# Altium PCB JacdacRgbLedBar10 58.PcbDoc
Units mm, origin at the board's own origin, x right, y up, seen from the top; angles counter-clockwise.
Board outline 16.5 x 83.15 mm, 2 copper layers (Top Layer, Bottom Layer), stack 1.525 mm thick; 47 components, 24 nets, 144 pads, 28 vias.
Unrouted connection lines stored in the file: 14.
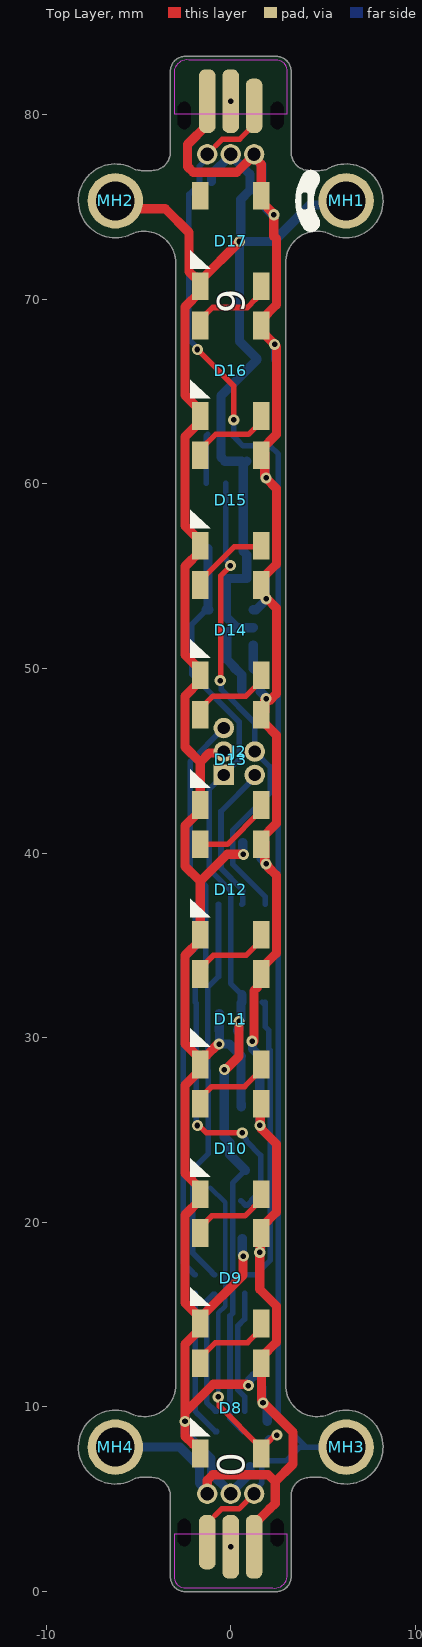
[diagram p0: Top Layer view]
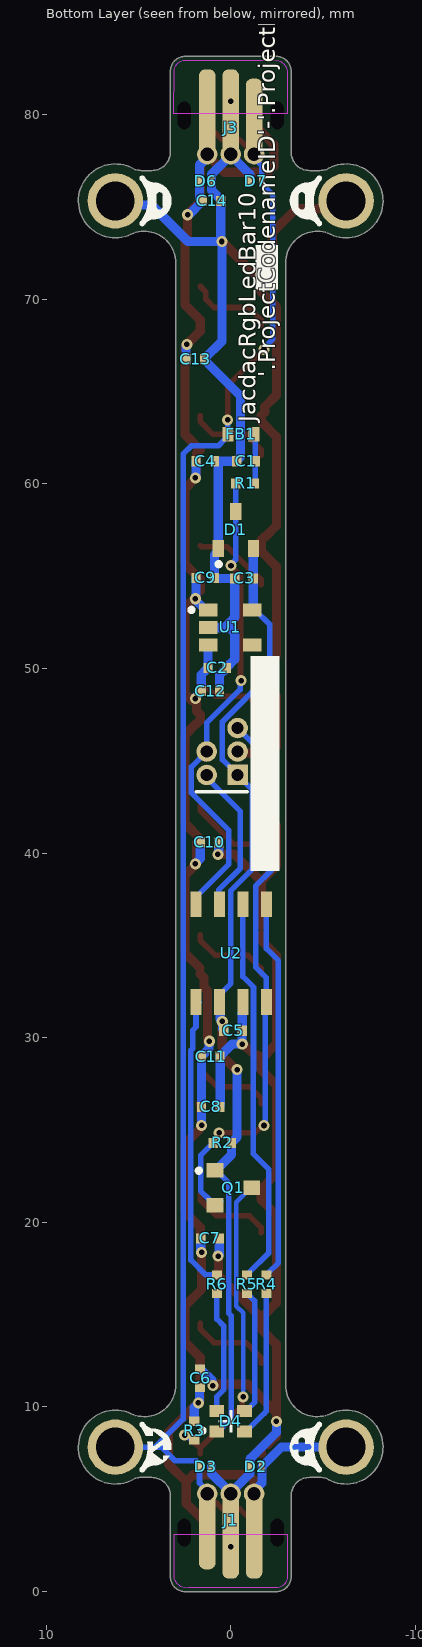
[diagram p1: Bottom Layer view, seen from below]
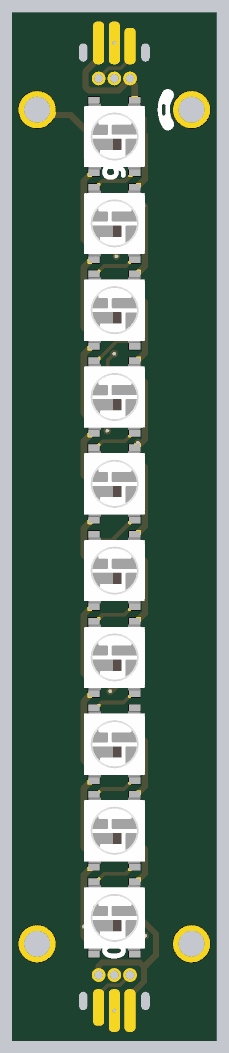
[diagram p2: 3D render of the assembled board from above, using the file's embedded part models]

## Layer stack, top to bottom
Top Solder: solder mask 0.0102, Solder Resist, Dk 3.5
Top Layer: signal copper 0.0356
Dielectric 1: core 1.454, FR-4, Dk 4.2
Bottom Layer: signal copper 0.0356
Bottom Solder: solder mask 0.0102, Solder Resist, Dk 3.5

## Board outline
-4.831,6.183 -4.27,6.183 cw(c-4.27,5.183) -3.27,5.183 -3.27,0.8 ccw(c-2.47,0.8) -2.47,0 2.47,0 ccw(c2.47,0.8) 3.27,0.8 3.27,5.183 cw(c4.27,5.183) 4.27,6.183 4.831,6.183 cw(c4.831,5.183) 5.304,6.064 ccw(c6.25,7.826) 5.4,9.636 cw(c4.677,11.175) 2.977,11.175 2.977,71.976 cw(c4.677,71.976) 5.4,73.515 ccw(c6.25,75.325) 5.304,77.087 cw(c4.831,77.968) 4.831,76.968 4.27,76.968 cw(c4.27,77.968) 3.27,77.968 3.27,77.966 3.27,82.35 ccw(c2.47,82.35) 2.47,83.15 -2.47,83.15 ccw(c-2.47,82.35) -3.27,82.35 -3.27,77.965 -3.27,77.968 cw(c-4.27,77.968) -4.27,76.968 -4.831,76.968 cw(c-4.831,77.968) -5.304,77.087 ccw(c-6.25,75.325) -5.4,73.515 cw(c-4.677,71.976) -2.977,71.976 -2.978,11.175 cw(c-4.678,11.175) -5.4,9.636 ccw(c-6.25,7.826) -5.304,6.064 cw(c-4.831,5.183)

## Design rules (kind name [scope] priority, off if disabled: settings)
AssemblyTestPointUsage [All] p1: valid=2
BoardOutlineClearance BoardOutlineSwitchClearance [InComponent('SW1')] p1: gap=0.3 ignorepadtopadclearanceinfootprint=FALSE except(0: Arc-SplitContinuation Track-SplitContinuation SMDPad-SplitContinuation THPad-OutlineEdge THPad-SplitContinuation Via-SplitContinuation Fill-SplitContinuation Poly-SplitContinuation Region-SplitContinuation Text-SplitContinuation; 0.2: Text-OutlineEdge)
BoardOutlineClearance [All] p2: gap=0.3 ignorepadtopadclearanceinfootprint=FALSE except(0: Arc-SplitContinuation Track-CutoutEdge Track-SplitContinuation SMDPad-SplitContinuation THPad-SplitContinuation Via-SplitContinuation Fill-SplitContinuation Poly-SplitContinuation Region-OutlineEdge Region-SplitContinuation Text-OutlineEdge Text-SplitContinuation; 0.2: SMDPad-CutoutEdge; 0.25: Arc-OutlineEdge Arc-CutoutEdge Track-OutlineEdge SMDPad-OutlineEdge THPad-OutlineEdge Poly-OutlineEdge Region-CutoutEdge)
Clearance [All] p1: gap=0.125 ignorepadtopadclearanceinfootprint=FALSE except(0: Arc-Hole Track-Hole SMDPad-Hole THPad-Hole Via-Hole Fill-Hole Poly-Hole Region-Hole Text-Hole)
ComponentClearance MH5.0KeepoutaAreaClearance [InComponent('MH1') or InComponent('MH2')  or InComponent('MH3') or InComponent('MH4') or InComponent('J2') vs InComponent('D6') or InComponent('D7') or InComponent('D8') or InComponent('D9') or InComponent('D10') or InComponent('D11') or InComponent('D12') or InComponent('D13') or InComponent('C6') or InComponent('C7') or InComponent('C8')  or  InComponent('C9') or  InComponent('C12')] p1: gap=0 collisioncheckmode=3 verticalgap=0 showdistances=FALSE
ComponentClearance [All] p2: gap=0.2 collisioncheckmode=3 verticalgap=0.2 showdistances=FALSE
DiffPairsRouting [All] p1: maxlimit=2 minlimit=0.15 mostfreqgap=0.15 toplayer_minwidth=0.15 toplayer_maxwidth=2 toplayer_prefwidth=0.15 bottomlayer_minwidth=0.15 bottomlayer_maxwidth=2 bottomlayer_prefwidth=0.15 substack1={CB9D278B-8BF5-444A-AAF4-837A2A9DF42D} toplayer_{cb9d278b-8bf5-444a-aaf4-837a2a9df42d}_minwidth=0.381 toplayer_{cb9d278b-8bf5-444a-aaf4-837a2a9df42d}_maxwidth=0.381 toplayer_{cb9d278b-8bf5-444a-aaf4-837a2a9df42d}_prefwidth=0.381 bottomlayer_{cb9d278b-8bf5-444a-aaf4-837a2a9df42d}_minwidth=0.381 bottomlayer_{cb9d278b-8bf5-444a-aaf4-837a2a9df42d}_maxwidth=0.381 bottomlayer_{cb9d278b-8bf5-444a-aaf4-837a2a9df42d}_prefwidth=0.381 substack2={826B8647-A721-4255-895A-19F9591B9CD1} toplayer_{826b8647-a721-4255-895a-19f9591b9cd1}_minwidth=0.381 toplayer_{826b8647-a721-4255-895a-19f9591b9cd1}_maxwidth=0.381 toplayer_{826b8647-a721-4255-895a-19f9591b9cd1}_prefwidth=0.381 bottomlayer_{826b8647-a721-4255-895a-19f9591b9cd1}_minwidth=0.381 bottomlayer_{826b8647-a721-4255-895a-19f9591b9cd1}_maxwidth=0.381 bottomlayer_{826b8647-a721-4255-895a-19f9591b9cd1}_prefwidth=0.381 substack3={E64FCAF4-1BC8-437D-B1E0-0E5F2DC0F59E} toplayer_{e64fcaf4-1bc8-437d-b1e0-0e5f2dc0f59e}_minwidth=0.381 toplayer_{e64fcaf4-1bc8-437d-b1e0-0e5f2dc0f59e}_maxwidth=0.381 toplayer_{e64fcaf4-1bc8-437d-b1e0-0e5f2dc0f59e}_prefwidth=0.381 bottomlayer_{e64fcaf4-1bc8-437d-b1e0-0e5f2dc0f59e}_minwidth=0.381 bottomlayer_{e64fcaf4-1bc8-437d-b1e0-0e5f2dc0f59e}_maxwidth=0.381 bottomlayer_{e64fcaf4-1bc8-437d-b1e0-0e5f2dc0f59e}_prefwidth=0.381 substack4={E61CE66C-507C-4E1E-8E83-C905434AFC1C} toplayer_{e61ce66c-507c-4e1e-8e83-c905434afc1c}_minwidth=0.381 toplayer_{e61ce66c-507c-4e1e-8e83-c905434afc1c}_maxwidth=0.381 toplayer_{e61ce66c-507c-4e1e-8e83-c905434afc1c}_prefwidth=0.381 bottomlayer_{e61ce66c-507c-4e1e-8e83-c905434afc1c}_minwidth=0.381 bottomlayer_{e61ce66c-507c-4e1e-8e83-c905434afc1c}_maxwidth=0.381 bottomlayer_{e61ce66c-507c-4e1e-8e83-c905434afc1c}_prefwidth=0.381 maxuncoupledlength=25
FabricationTestPointUsage [All] p1: valid=2 allowmultiple=FALSE
HoleSize [All] p1: absolutevalues=TRUE maxlimit=2.54 minlimit=0.2 maxpercent=80.000 minpercent=20.000
MinimumSolderMaskSliver [All] p1: minsoldermaskwidth=0.005
PlaneClearance [All] p1: clearance=0.3
PlaneConnect [All] p1: planeconnectstyle=Relief reliefexpansion=0.5 reliefentries=4 reliefconductorwidth=0.2 reliefairgap=0.3
PolygonConnect "PolygonConnect GND" [isVIA] p1: connectstyle=Relief reliefconductorwidth=0.2 reliefentries=4 polygonreliefangle="90 Angle" airgapwidth=0.2
PolygonConnect [All] p2: connectstyle=Relief reliefconductorwidth=0.2 reliefentries=4 polygonreliefangle="90 Angle" airgapwidth=0.2
RoutingVias [All] p1: holewidth=0.3 width=0.6 viastyle="Through Hole" minholewidth=0.3 minwidth=0.6 maxholewidth=0.3 maxwidth=0.8
SilkToSilkClearance [All] p1: silktosilkclearance=0.001
SilkToSolderMaskClearance [IsPad] p1: minsilkscreentomaskgap=0.05 clearancetoexposedcopper=TRUE
SolderMaskExpansion [All] p1: expansion=0.075 istentingtop=FALSE
Width [All] p1: maxlimit=2 minlimit=0.15 preferedwidth=0.15 substack1={CB9D278B-8BF5-444A-AAF4-837A2A9DF42D} substack2={826B8647-A721-4255-895A-19F9591B9CD1} substack3={E64FCAF4-1BC8-437D-B1E0-0E5F2DC0F59E} substack4={E61CE66C-507C-4E1E-8E83-C905434AFC1C} minimp=50.000000 maximp=50.000000 favimp=50.000000
20 further rules are at their usual default settings.

## Components (designator, comment, footprint, x,y, rotation, side; value= is the part's Value field where it differs from the comment)
C1 "CL05C330JB51PNC" "C0402_0.55MM - WITHOUT OUTLINE" -0.825,61.225 r180 bottom
C2 "CL05A105KP5NNNC" "C0402_0.55MM - WITHOUT OUTLINE" 0.725,50.025 r0 bottom
C3 "CL05A105KP5NNNC" "C0402_0.55MM - WITHOUT OUTLINE" -0.725,54.875 r180 bottom
C4 "CL05B104KP5NNNC" "C0402_0.55MM - WITHOUT OUTLINE" 1.375,61.225 r0 bottom
C5 "CL05A105KP5NNNC" "C0402_0.55MM - WITHOUT OUTLINE" -0.125,30.375 r0 bottom
C6 "CL05B104KP5NNNC" "C0402_0.55MM - WITHOUT OUTLINE" 1.662,11.55 r270 bottom
C7 "CL05B104KP5NNNC" "C0402_0.55MM - WITHOUT OUTLINE" 1.125,19.125 r0 bottom
C8 "CL05B104KP5NNNC" "C0402_0.55MM - WITHOUT OUTLINE" 1.075,26.25 r0 bottom
C9 "CL05B104KP5NNNC" "C0402_0.55MM - WITHOUT OUTLINE" 1.375,54.9 r0 bottom
C10 "CL05B104KP5NNNC" "C0402_0.55MM - WITHOUT OUTLINE" 1.15,40.575 r0 bottom
C11 "CL05B104KP5NNNC" "C0402_0.55MM - WITHOUT OUTLINE" 1.075,28.975 r0 bottom
C12 "CL05B104KP5NNNC" "C0402_0.55MM - WITHOUT OUTLINE" 1.1,48.775 r0 bottom
C13 "CL05B104KP5NNNC" "C0402_0.55MM - without outline" 1.925,66.75 r0 bottom
C14 "CL05B104KP5NNNC" "C0402_0.55MM - without outline" 1.04,75.325 r0 bottom
D1 "BAT54S" "NXP-BAT54S-TO-236AB - WITHOUT OUTLINE" -0.275,57.5 r90 bottom
D2 "RCLAMP0521P-N" "TVS 0402 - without outline" -1.365,6.77 r0 bottom
D3 "RCLAMP0521P-N" "TVS 0402 - without outline" 1.365,6.77 r180 bottom
D4 "TZ-P4-1615RGBTCA1-0.55T" TZ-P4-1615RGBTCA1-0.55T 0,9.222 r180 bottom
D6 "RCLAMP0521P-N" "TVS 0402 - without outline" 1.365,76.38 r180 bottom
D7 "RCLAMP0521P-N" "TVS 0402 - without outline" -1.365,76.38 r0 bottom
D8 "WS2812E" WS2812E-5050 0,9.925 r270 top
D9 "WS2812E" WS2812E-5050 0,16.975 r270 top
D10 "WS2812E" WS2812E-5050 0,23.975 r270 top
D11 "WS2812E" WS2812E-5050 0,31 r270 top
D12 "WS2812E" WS2812E-5050 0,38.025 r270 top
D13 "WS2812E" WS2812E-5050 0,45.05 r270 top
D14 "WS2812E" WS2812E-5050 0,52.075 r270 top
D15 "WS2812E" WS2812E-5050 0,59.1 r270 top
D16 "WS2812E" WS2812E-5050 0,66.125 r270 top
D17 "WS2812E" WS2812E-5050 0,73.15 r270 top
FB1 "TDK MPZ1608S102ATA00" "TDK MPZ1608 0.8mm - without outline" -0.55,62.68 r180 bottom
J1 "3 pin JACDAC edge connector" JACDAC_EDGE_CONNECTOR_NO_TRACES 0,5.85 r0 bottom
J2 "Hack Connect Mini 1.27 mm pitch 2-row" HACK_CONNECT_MINI_5_X_1_27 -0.375,44.23 r0 top
J3 "3 pin JACDAC edge connector" JACDAC_EDGE_CONNECTOR_NO_TRACES 0,77.3 r180 bottom
MH1 "MH_5.0MMK_3.0MMC_2.1MMD_PTH" MH_5.0MMK_3.0MMC_2.1MMD_PTH 6.25,75.325 r0 top
MH2 "MH_5.0MMK_3.0MMC_2.1MMD_PTH" MH_5.0MMK_3.0MMC_2.1MMD_PTH -6.25,75.325 r225 top
MH3 "MH_5.0MMK_3.0MMC_2.1MMD_PTH" MH_5.0MMK_3.0MMC_2.1MMD_PTH 6.25,7.825 r0 top
MH4 "MH_5.0MMK_3.0MMC_2.1MMD_PTH" MH_5.0MMK_3.0MMC_2.1MMD_PTH -6.25,7.825 r180 top
Q1 "2N7002K" SOT-23 -0.15,21.875 r180 bottom
R1 "RC0402FR-07220RL" "R0402 - Without outline" -0.775,60.025 r180 bottom
R2 "10k" "R0402 - Without outline" 0.45,24.3 r0 bottom
R3 "10k" "R0402 - Without outline" 1.975,8.725 r270 bottom
R4 "RC0402FR-0730RL" "R0402 - WITHOUT OUTLINE" -1.93,16.65 r90 bottom
R5 "RC0402FR-0730RL" "R0402 - Without outline" -0.875,16.65 r90 bottom
R6 "RC0402FR-07150RL" "R0402 - Without outline" 0.75,16.65 r90 bottom
U1 "LDO 3.3V/300 mA" "ON_SEMI-SOT23-5 - WITHOUT OUTLINE" 0.025,52.225 r180 bottom
U2 "STM32G031J6M6" 8-SOIC -0.025,34.575 r90 bottom

## Footprints (in the part's own frame and the unit in brackets; to place one, negate y for a bottom-side part, rotate by r counter-clockwise, add the part's x,y. Pads: shape width x height; smd on the part's side, far side on the other; paste and mask are expansions set on the pad)
8-SOIC [mm] "8-SOIC (0.154\", 3.90mm Width)"
  rect 1.4x0.6 smd: 1(-2.65,1.905) 2(-2.65,0.635) 3(-2.65,-0.635) 4(-2.65,-1.905) 5(2.65,-1.905) 6(2.65,-0.635) 7(2.65,0.635) 8(2.65,1.905)
  body extent -2.96,-2.51 2.96,2.51, height 1.75
"C0402_0.55MM - WITHOUT OUTLINE" [mm]
  rect 0.5x0.55 smd: 1(-0.5,0) 2(0.5,0)
  body extent -0.5,-0.25 0.5,0.25, height 0.55
"C0402_0.55MM - without outline" [mm]
  rect 0.5x0.55 smd: 1(-0.5,0) 2(0.5,0)
  body extent -0.5,-0.25 0.5,0.25, height 0.55
HACK_CONNECT_MINI_5_X_1_27 [mm]
  rect 1.11x1.11 hole 0.66: 1(0,0)
  round 1.11 hole 0.66: 2(1.676,0) 3(0,1.27) 4(1.676,1.27) 5(0,2.54)
JACDAC_EDGE_CONNECTOR_NO_TRACES [mm] "JacDac 3 pin connector with no traces"
  rrect78% 0.9x2.95 smd far side paste-1 mask+0: 1(-1.27,3.175)
  round 1.11 / inner round 0.71 / far side round 1.1 hole 0.71 paste-0.254 mask+0: 1(1.27,0.55) 2(0,0.55) 3(-1.27,0.55)
  rrect78% 0.9x4.3 smd paste-1 mask+0: 1(1.27,2.5)
  rrect78% 0.9x4.8 smd paste-1 mask+0: 2(0,2.75) 3(-1.27,2.75)
  rrect78% 0.9x3.45 smd far side paste-1 mask+0: 2(0,3.425) 3(1.27,3.425)
  round 0 hole 0.7 slot 1.5 at 90 deg unplated: ""(-2.52,2.65) ""(2.52,2.65)
  Top Layer keep-out region: -3.075,2.75 -3.07,5.033 -2.987,5.341 -2.761,5.567 -2.453,5.65 -2.453,5.65 2.27,5.65 2.545,5.635 2.794,5.516 2.978,5.31 3.07,5.05 3.07,5.05 3.07,2.75
  Bottom Layer lines w0.2: -1.27,0.85 -1.126,0.85
  Bottom Layer keep-out region: -3.07,2.75 -3.07,5.033 -3.023,5.269 -2.889,5.469 -2.689,5.603 -2.453,5.65 -2.453,5.65 2.27,5.65 2.545,5.635 2.794,5.516 2.978,5.31 3.07,5.05 3.07,5.05 3.07,2.75
MH_5.0MMK_3.0MMC_2.1MMD_PTH [mm] "Mounting Hole 5.0mm clearance, 3.1 annualar ring and 2.1mm PTH"
  round 3 hole 2.1 mask+0.05: 1(0,0)
"NXP-BAT54S-TO-236AB - WITHOUT OUTLINE" [mm] "SOT23, 3-Leads, Body 2.90x2.30mm, Pitch 0.95mm, IPC Medium Density"
  rect 0.9x0.6 smd: 1(-1,0.95) 2(-1,-0.95) 3(1,0)
  silkscreen extent -1.95,0.83 -1.75,1.02, body extent -1.32,-1.5 1.32,1.5, height 1.12
"ON_SEMI-SOT23-5 - WITHOUT OUTLINE" [mm]
  rect 1x0.7 smd: 1(-1.2,0.95) 2(-1.2,0) 3(-1.2,-0.95) 4(1.2,-0.95) 5(1.2,0.95)
  silkscreen extent -2.2,0.85 -2,1.05, body extent -1.5,-1.57 1.5,1.58, height 1.1
"R0402 - Without outline" [mm]
  rect 0.5x0.55 smd: 1(-0.5,0) 2(0.5,0)
  body extent -0.5,-0.25 0.5,0.25, height 0.35
"R0402 - WITHOUT OUTLINE" [mm]
  rect 0.5x0.55 smd: 1(-0.5,0) 2(0.5,0)
  body extent -0.5,-0.25 0.5,0.25, height 0.35
SOT-23 [mm] "SOT23, 3-Leads, Body 2.90x2.45mm, Pitch 0.95mm, IPC Medium Density"
  rect 0.9x0.8 smd: 1(-1,0.95) 2(-1,-0.95) 3(1,0)
  silkscreen extent -1.97,0.83 -1.78,1.02, body extent -1.27,-1.5 1.23,1.5, height 1.1
"TDK MPZ1608 0.8mm - without outline" [mm]
  rect 0.6x0.8 smd paste-0.1: 1(-0.7,0) 2(0.7,0)
  body extent -0.8,-0.4 0.8,0.4, height 0.8
"TVS 0402 - without outline" [mm] "TVS 0402 RoHS"
  rect 0.3x0.55 smd mask+0.05: 1(-0.325,0) 2(0.325,0)
  body extent -0.5,-0.3 0.5,0.3, height 0.5
TZ-P4-1615RGBTCA1-0.55T [mm] "1615 Light Emitting Diodes (LED) RoHS"
  rect 0.8x0.65 smd mask+0.05: 1(-0.75,-0.55) 2(-0.75,0.55) 3(0.75,0.55) 4(0.75,-0.55)
  silkscreen extent -1.62,-0.61 0.07,0.6, body extent -0.8,-0.75 0.8,0.75, height 0.55
WS2812E-5050 [mm] "SMD-5050 Light Emitting Diodes"
  rect 1.5x0.9 smd: 1(-2.45,1.65) 2(-2.45,-1.65) 3(2.45,-1.65) 4(2.45,1.65)
  silkscreen extent 0.5,-2.2 1.5,-1.1, body extent -2.68,-2.45 2.67,2.5, height 1.5

## Part data
C1: "CAP CER 33PF 50V NP0 0402", Capacitance=33pF, Case Code (Imperial)=0402, Case Code (Metric)=1005, Manufacturer=Samsung, Max Operating Temperature=125°C, Min Operating Temperature=-55°C, Ratings=AEC-Q200, Supplier Part Number 1=1276-6515-1-ND, Tolerance=5%, Voltage Rating=50V, Case/Package=0402, Category=Capacitors, Checked=?, ComponentLink1Description="Samsung datasheet online", ComponentLink1URL=http://www.samsungsem.com/kr/support/library/product-catalog/mlcc.jsp, Created=DG, Lead Free="Lead Free", Length=0.039inch, Manufacturer Part Number=CL05C330JB51PNC, Mount="Surface Mount", Packaging="Tape and Reel", Pricing 1="1=0.10000, 10=0.07500, 50=0.04060, 100=0.03320, 500=0.02374, 1000=0.01865, 2500=0.01696, 5000=0.01560 (USD)", Pricing 2="1=0.11000, 10=0.08200, 100=0.03600, 500=0.02600, 1000=0.02000, 2500=0.01800 (USD)", Pricing 3="10000=0.00780 (USD)", RoHS=Yes, Stock 1=250654, Stock 2=97900, Stock 3=100000, Supplier 1=Digi-Key, Supplier 2=Mouser, Supplier 3="Future Electronics", Supplier Part Number 2=187-CL05C330JB51PNC, Supplier Part Number 3=6022520, Thickness=0.022inch, Width=0.02inch
C2 C3 C5: "CAP CER 1UF 10V X5R 0402", Capacitance=1µF, Case Code (Imperial)=0402, Case Code (Metric)=1005, Dielectric=X5R, Manufacturer=Samsung, Max Operating Temperature=85°C, Min Operating Temperature=-55°C, Package Quantity=1, Supplier Part Number 1=1276-1076-1-ND, Tolerance=10%, Voltage Rating=10V, Case/Package=0402, Category=Capacitors, Checked=?, ComponentLink1Description="Online datasheet", ComponentLink1URL=https://datasheet.ciiva.com/15195/getdatasheetpartid-358390-15195630.pdf, Contact Plating=Tin, Created=DG, Depth=0.5mm, Height=0.5mm, Length=1mm, Manufacturer Part Number=CL05A105KP5NNNC, Material=Ceramic, Mount="Surface Mount", Packaging="Tape and Reel", Pricing 1="1=0.10000, 10=0.03900, 50=0.02100, 100=0.01720, 500=0.01228, 1000=0.00965, 2500=0.00877, 5000=0.00807 (USD)", Pricing 2="1=0.10000, 10=0.04200, 100=0.01800, 500=0.01300, 1000=0.01000, 2500=0.00900 (USD)", Pricing 3="10=0.02450, 100=0.02000, 500=0.01310, 2500=0.00920, 5000=0.00810, 10000=0.00640, 50000=0.00490 (GBP)", Radiation Hardening=No, RoHS=Yes, Stock 1=5705569, Stock 2=928941, Stock 3=53670, Supplier 1=Digi-Key, Supplier 2=Mouser, Supplier 3=Farnell, Supplier Part Number 2=187-CL05A105KP5NNNC, Supplier Part Number 3=3013329, Thickness=0.022inch, Width=0.02inch
C4 C6 C7 C8 C9 C10 C11 C12 C13 C14: "CAP CER 0.1UF 10V X7R 0402", Capacitance=100nF, Case Code (Imperial)=0402, Case Code (Metric)=1005, Dielectric=X7R, Manufacturer=Samsung, Max Operating Temperature=125°C, Min Operating Temperature=-55°C, Package Quantity=1, Supplier Part Number 1=1276-1002-1-ND, Tolerance=10%, Voltage Rating=10V, Case/Package=0402, Category="Ceramic Capacitors", Checked=?, ComponentLink1Description="Samsung datasheet online", ComponentLink1URL=https://datasheet.ciiva.com/15165/getdatasheetpartid-37100-15165107.pdf, Contact Plating=Tin, Created=DG, Depth=0.5mm, Height=0.5mm, Length=1mm, Manufacturer Part Number=CL05B104KP5NNNC, Mount="Surface Mount", Packaging="Tape and Reel", Pricing 1="1=0.10000, 10=0.02500, 50=0.01380, 100=0.01130, 500=0.00804, 1000=0.00632, 2500=0.00575, 5000=0.00529 (USD)", Pricing 2="10000=0.00400, 20000=0.00400, 50000=0.00400 (USD)", Pricing 3="10=0.01620, 100=0.01310, 500=0.00740, 2500=0.00600, 5000=0.00470, 10000=0.00400, 50000=0.00320 (GBP)", Pricing 4="1=0.09000, 25=0.02300, 100=0.01000, 250=0.00900, 500=0.00700, 1000=0.00500, 2500=0.00500 (USD)", Pricing 5="1=0.00460, 500=0.00340, 1500=0.00320, 2500=0.00310, 5000=0.00300 (USD)", Radiation Hardening=No, RoHS=Yes, Stock 1=17321183, Stock 2=984124, Stock 3=39022, Stock 4=56730, Stock 5=20877033, Supplier 1=Digi-Key, Supplier 2=Mouser, Supplier 3=Farnell, Supplier 4=Newark, Supplier 5="Future Electronics", Supplier Part Number 2=187-CL05B104KP5NNNC, Supplier Part Number 3=3013351, Supplier Part Number 4=82AC9219, Supplier Part Number 5=9032525, Thickness=0.022inch, Width=0.02inch
D1: "DIODE ARRAY SCHOTTKY 30V SOT23", Manufacturer=Nexperia, Manufacturer Part Number=BAT54S,235, Supplier Part Number 1=1727-1868-1-ND, Category="Rectifier Diodes", ComponentLink1Description="NXP datasheet online", ComponentLink1URL=https://assets.nexperia.com/documents/data-sheet/BAT54_SER.pdf, Pricing 1="1=0.13000, 10=0.11900, 100=0.05610, 500=0.03326, 1000=0.02185, 5000=0.02138 (USD)", RoHS=No, Stock 1=14011, Supplier 1=Digi-Key, Supplier 2=Mouser, Supplier 3=RSComponents, Supplier Part Number 2=771-BAT54S235, Supplier Part Number 3=1707990
D2 D3 D6 D7: "Bidirectional 5V (Max) 6V 16V 3.5A (8/20us) 0402 TVS RoHS", Manufacturer="Born Semiconductor", Package=0402, Supplier1 Part Number=C316043, Checked By=?, ComponentLink1Description="Online datasheet", ComponentLink1URL=https://datasheet.lcsc.com/szlcsc/Bourne-Semicon-Shenzhen-RCLAMP0521P-N_C316043.pdf, Created By="D Gakure", Manufacturer Part Number=RCLAMP0521P-N, Supplier1=LCSC
D4: "1615 Light Emitting Diodes (LED) RoHS", Manufacturer=TUOZHAN, Package=1615, Supplier 1 Part Number=C779813, Category=Optoelectronics, Checked By=?, ComponentLink1Description="Online datasheet", ComponentLink1URL=https://datasheet.lcsc.com/szlcsc/2009041238_TUOZHAN-TZ-P4-1615RGBTCA1-0-55T_C779813.pdf, Created By="D. Gakure", Manufacturer Part Number=TZ-P4-1615RGBTCA1-0.55T, Packaging="Tape & Reel (TR)", RoHS="RoHS Compliant", Size / Dimension=1.6x1.5mm, Supplier 1=LCSC
D8 D9 D10 D11 D12 D13 D14 D15 D16 D17: library part WS2812E-5050, "WS2812E 5050 RGB LED WITH INTEGRATED DRIVER", Color=Blue,Green,Red, Manufacturer=Worldsemi, Supplier 1 Part Number 3=C139127, Category=LEDs, ComponentLink1Description="Online datasheet", ComponentLink1URL=https://datasheet.lcsc.com/lcsc/1811151230_Worldsemi-WS2812E_C139127.pdf, Length=5mm, Manufacturer Part Number=WS2812E, Mount="Surface Mount", RoHS=Yes, Supplier 1=LCSC, Width=5mm
FB1: "0603 1k@100MHz 0.8A chip", Case Code (Imperial)=0603, Case Code (Metric)=1608, Current Rating=800mA, DC Resistance (DCR)=300mR, Manufacturer=TDK, Manufacturer Part Number=MPZ1608S102ATA00, Package Quantity=4000, Supplier Part Number 1=445-8694-1-ND, Tolerance=25%, Case/Package=0603, ComponentLink2Description="datasheet online", ComponentLink2URL=https://www.mouser.co.uk/datasheet/2/400/eads_commercial_power_mpz1608_en-923650.pdf, ComponentLink3Description=datasheet, ComponentLink3URL="Y:\System\Altium\Libraries 2014\TDK\Datasheets\eads_commercial_power_mpz1608_en-923650.pdf", Core Material=Ferrite, Height=0.037inch, Impedance="1kR @ 100MHz", Length=0.063inch, Max DC Current=800mA, Mount="Surface Mount", Packaging="Tape and Reel", Pricing 1="1=0.1, 10=0.079, 25=0.0716, 50=0.0644, 100=0.0472, 250=0.03432, 500=0.03146, 1000=0.02717 (USD)", Stock 1=113542, Supplier 1=Digi-Key, Supplier 2=Mouser, Supplier Part Number 2=810-MPZ1608S102ATA00, Width=0.031inch
J1 J3: library part "JACDAC edge connector", "3 pin JACDAC edge connector 1.27mm pitch", Manufacturer Part Number=JACDAC_EDGE_CONNECTOR, Checked By=?, ComponentLink1Description="Yuliang JACDAC cable connector drawing online", ComponentLink1URL=https://github.com/microsoft/jacdac-mdk/blob/main/connector/JACDAC-Connector-by-Yuliang-2020-11-28.pdf, ComponentLink2Description="JACDAC PCB edge connector spec onlin", ComponentLink2URL=https://github.com/microsoft/jacdac-mdk/blob/main/connector/JACDAC_PCB_Edge_Connector_Drawing_JD-PEC-01_rev_01.pdf, Created By="D. Gakure", PCB Type="1.6mm FR4"
J2: library part HACK_CONNECT_MINI
MH1 MH2 MH3 MH4: "Mounting Hole 5.0mm keepout, 3.0mm annualar ring and 2.1mm Drill PTH"
Q1: library part "2N7002K (2)", "MOSFET Transistor, N Channel, 300 mA, 60 V, 2 ohm, 10 V, 2.5 V", Case/Package=SOT-23, Continuous Drain Current (ID)=300mA, Drain to Source Breakdown Voltage=60V, Drain to Source Resistance=2R, Gate to Source Voltage (Vgs)=20V, Input Capacitance=50pF, Manufacturer="ON Semiconductor / Fairchild", Max Operating Temperature=150°C, Max Power Dissipation=350mW, Min Operating Temperature=-55°C, Package Quantity=1, Supplier Part Number 1=2N7002KCT-ND, Threshold Voltage=2.5V, Category=MOSFETs, Checked By=?, ComponentLink1Description="Online datasheet", ComponentLink1URL=https://www.onsemi.com/pdf/datasheet/2n7002k-d.pdf, Contact Plating=Tin,Matte, Created By="D. Gakure", Drain to Source Voltage (Vdss)=60V, Drain-source On Resistance-Max=2R, Element Configuration=Single, Height=1.2mm, Lead Free="Lead Free", Length=2.92mm, Manufacturer Part Number=2N7002K, Mount="Surface Mount", Number of Elements=1, Number of Pins=3, On-State Resistance=2R, Packaging="Tape and Reel", Polarity=N-CHANNEL, Power Dissipation=350mW, Pricing 1="1=0.40000, 10=0.32500, 25=0.27240, 100=0.17240, 500=0.11344, 1000=0.07714 (USD)", Pricing 2="1=0.40000, 10=0.27300, 50=0.27300, 100=0.13400, 1000=0.07800, 10000=0.05100 (USD)", Pricing 3="5=0.34800, 10=0.23500, 100=0.09100, 500=0.05850, 3000=0.04630, 9000=0.03860, 24000=0.03750, 45000=0.03530 (GBP)", Radiation Hardening=No, Rds On Max=2R, REACH SVHC="No SVHC", RoHS=Yes, Stock 1=53564, Stock 2=111825, Stock 3=101059, Supplier 1=Digi-Key, Supplier 2=Mouser, Supplier 3=Farnell, Supplier Part Number 2=512-2N7002K, Supplier Part Number 3=2453382, Turn-Off Delay Time=30ns, Turn-On Delay Time=5ns, Voltage=60V, Width=1.3mm
R1: "RES SMD 220 OHM 1% 1/16W 0402", Case Code (Imperial)=0402, Case Code (Metric)=1005, Manufacturer=Yageo, Max Operating Temperature=155°C, Max Power Dissipation=63mW, Min Operating Temperature=-55°C, Package Quantity=1, Power Rating=62.5mW, Resistance=220R, Resistor Type="Thick Film", Supplier Part Number 1=311-220LRCT-ND, Temperature Coefficient=100ppm/°C, Tolerance=1%, Voltage Rating=50V, Case/Package=0402, Category=Resistors, Checked=?, ComponentLink1Description="Online datasheet", ComponentLink1URL=https://datasheet.ciiva.com/11819/0900766b80c66297-11819466.pdf, Created=D.G, Depth=0.5mm, Features="Moisture Resistant", Height=0.016inch, Lead Free="Lead Free", Length=1mm, Manufacturer Part Number=RC0402FR-07220RL, Military Standard=Not, Number of Pins=2, Number of Terminations=2, Packaging="Tape and Reel", Pricing 1="1=0.10000, 10=0.01400, 100=0.00580, 1000=0.00262, 2500=0.00228, 5000=0.00188 (USD)", Pricing 2="1=0.10000, 10=0.01200, 100=0.00400, 1000=0.00400, 2500=0.00400, 10000=0.00300 (USD)", Pricing 3="1=0.08130, 25=0.01210, 100=0.01120, 250=0.01030, 500=0.00900 (GBP)", REACH SVHC="No SVHC", RoHS=Yes, Stock 1=1286042, Stock 2=324625, Stock 3=18234, Supplier 1=Digi-Key, Supplier 2=Mouser, Supplier 3=Farnell, Supplier Part Number 2=603-RC0402FR-07220RL, Supplier Part Number 3=2147864, Termination=SMD/SMT, Voltage Rating (DC)=50V, Width=0.02inch
R2 R3: library part RC0402FR-0710KL, "RES SMD 10K OHM 1% 1/16W 0402", Case Code (Imperial)=0402, Case Code (Metric)=1005, Manufacturer=Yageo, Max Operating Temperature=155°C, Min Operating Temperature=-55°C, Power Rating=62.5mW, Resistance=10kR, Resistor Type="Thick Film", Supplier Part Number 1=311-10.0KLRCT-ND, Temperature Coefficient=100ppm/°C, Tolerance=1%, Voltage Rating=50V, Case/Package=0402, Category=Resistors, Checked=?, ComponentLink1Description=https://datasheet.ciiva.com/7660/38568-7660787.pdf?src-supplier=Element14, ComponentLink1URL=https://datasheet.ciiva.com/7660/38568-7660787.pdf?src-supplier=Element14, ComponentLink2Description=https://datasheet.ciiva.com/7849/1784430-7849813.pdf?src-supplier=Element14, ComponentLink2URL=https://datasheet.ciiva.com/7849/1784430-7849813.pdf?src-supplier=Element14, ComponentLink3Description=https://datasheet.ciiva.com/7849/1686128-7849814.pdf?src-supplier=Element14, ComponentLink3URL=https://datasheet.ciiva.com/7849/1686128-7849814.pdf?src-supplier=Element14, ComponentLink4Description=https://datasheet.ciiva.com/7849/1784430-7849815.pdf?src-supplier=Element14, ComponentLink4URL=https://datasheet.ciiva.com/7849/1784430-7849815.pdf?src-supplier=Element14, ComponentLink5Description=https://datasheet.ciiva.com/22747/1018594-22747512.pdf?src-supplier=Element14, ComponentLink5URL=https://datasheet.ciiva.com/22747/1018594-22747512.pdf?src-supplier=Element14, ComponentLink6Description=https://datasheet.ciiva.com/12667/pyu-rc0402-51-rohs-l-6-r-12667067.pdf?src-supplier=Mouser, ComponentLink6URL=https://datasheet.ciiva.com/12667/pyu-rc0402-51-rohs-l-6-r-12667067.pdf?src-supplier=Mouser, ComponentLink7Description=https://datasheet.ciiva.com/7983/1018594-7983486.pdf?src-supplier=Element14, ComponentLink7URL=https://datasheet.ciiva.com/7983/1018594-7983486.pdf?src-supplier=Element14, Created=DG, Depth=0.5mm, Height=0.32mm, Lead Free="Lead Free", Lead Pitch=0.2mm, Length=1mm, Manufacturer Part Number=RC0402FR-0710KL, Military Standard=Not, Number of Pins=2, Number of Terminations=2, Packaging="Tape and Reel", Pricing 1="1=0.10000, 10=0.01400, 100=0.00580, 1000=0.00262, 2500=0.00228, 5000=0.00188 (USD)", Pricing 2="1=0.10000, 10=0.01300, 100=0.00400, 1000=0.00300, 2500=0.00300, 10000=0.00200 (USD)", Pricing 3="10000=0.00350 (GBP)", REACH SVHC="No SVHC", RoHS=Yes, Stock 1=40173593, Stock 2=23672167, Stock 3=370000, Supplier 1=Digi-Key, Supplier 2=Mouser, Supplier 3=Farnell, Supplier Part Number 2=603-RC0402FR-0710KL, Supplier Part Number 3=2363463, Termination=SMD/SMT, Voltage Rating (DC)=50V, Width=0.5mm, Working Voltage=50V
R4 R5: "RES SMD 30 OHM 1% 1/16W 0402", Case Code (Imperial)=0402, Case Code (Metric)=1005, Manufacturer=Yageo, Max Operating Temperature=155°C, Max Power Dissipation=63mW, Min Operating Temperature=-55°C, Resistance=30R, Resistance Tolerance=1%, Resistor Type="Thick Film", Supplier Part Number 1=311-30LRCT-ND, Temperature Coefficient=100ppm/°C, Voltage Rating=50V, Case/Package=0402, Category="Chip SMD Resistors", Checked By=?, ComponentLink1Description="Online datasheet", ComponentLink1URL=https://datasheet.ciiva.com/7849/1018594-7849958.pdf, Construction=Rectangular, Contact Plating=Tin,Matte, Created By="D. Gakure", Depth=0.5mm, Features="Moisture Resistant", Height=0.35mm, Lead Free="Lead Free", Length=1mm, Manufacturer Part Number=RC0402FR-0730RL, Military Standard=Not, Number of Terminations=2, Packaging="Tape and Reel", Power Rating=63mW, Pricing 1="1=0.10000, 10=0.01400, 100=0.00580, 1000=0.00260, 2500=0.00226, 5000=0.00186 (USD)", Pricing 2="1=0.10000, 10=0.01200, 50=0.01200, 100=0.00400, 1000=0.00400, 10000=0.00300 (USD)", Pricing 3="10=0.01210, 100=0.00420, 500=0.00370, 2500=0.00280, 5000=0.00250, 10000=0.00230, 50000=0.00150 (GBP)", REACH SVHC=Unknown, RoHS=Yes, RoHS Compliant=Yes, Series=RC, Size Code=0402, Stock 1=2973, Stock 2=41804, Stock 3=4422, Supplier 1=Digi-Key, Supplier 2=Mouser, Supplier 3=Farnell, Supplier Part Number 2=603-RC0402FR-0730RL, Supplier Part Number 3=1458775, Termination=SMD/SMT, Tolerance=1%, Voltage Rating (DC)=50V, Width=0.5mm
R6: "RES SMD 150 OHM 1% 1/16W 0402", Case Code (Imperial)=0402, Case Code (Metric)=1005, Manufacturer=Yageo, Max Operating Temperature=155°C, Max Power Dissipation=63mW, Min Operating Temperature=-55°C, Package Quantity=1, Power Rating=62.5mW, Resistance=150R, Resistance Tolerance=1%, Resistor Type="Thick Film", Supplier Part Number 1=311-150LRCT-ND, Temperature Coefficient=100ppm/°C, Voltage Rating=50V, Case/Package=0402, Category="Chip SMD Resistors", Checked By=?, ComponentLink1Description="ine datasheet", ComponentLink1URL=https://datasheet.ciiva.com/11808/0900766b80c66297-11808422.pdf, Construction=Rectangular, Created By="D. Gakure", Depth=0.5mm, Features="Moisture Resistant", Height=0.016inch, Lead Free="Lead Free", Length=1mm, Manufacturer Part Number=RC0402FR-07150RL, Military Standard=Not, Number of Terminations=2, Packaging="Tape and Reel", Pricing 1="1=0.10000, 10=0.01400, 100=0.00580, 1000=0.00260, 2500=0.00226, 5000=0.00186 (USD)", Pricing 2="1=0.10000, 10=0.01200, 50=0.01200, 100=0.00400, 1000=0.00400, 10000=0.00300 (USD)", Pricing 3="10000=0.00270, 50000=0.00200 (GBP)", REACH SVHC="No SVHC", RoHS=Yes, RoHS Compliant=Yes, Series=RC, Stock 1=5214533, Stock 2=582717, Stock 3=880000, Supplier 1=Digi-Key, Supplier 2=Mouser, Supplier 3=Farnell, Supplier Part Number 2=603-RC0402FR-07150RL, Supplier Part Number 3=2421893, Technology="THICK FILM", Termination=SMD/SMT, Tolerance=1%, Width=0.02inch, Working Voltage=50V
U1: library part NCP114ASN330T1G, "ON SEMICONDUCTOR - NCP114ASN330T1G - LDO Voltage Regulator, Fixed, 1.7 V to 5.5 V in, 3.3 V/300 mA out, 150 mV drop, TSOP-5", Case/Package=SOT-23-5, Dropout Voltage=225mV, Manufacturer="ON Semiconductor", Max Input Voltage=5.5V, Max Operating Temperature=85°C, Min Operating Temperature=-40°C, Min Output Voltage=3.3V, Output Current=300mA, Power Supply Rejection Ratio (PSRR)=75dB, Quiescent Current=95uA, Supplier Part Number 1=NCP114ASN330T1GOSCT-ND, Category="Voltage Regulators - Linear", Checked=?, ComponentLink3Description="On Semi datasheet online", ComponentLink3URL=http://www.onsemi.com/pub/Collateral/NCP114-D.PDF, Created=DG, Lead Free="Lead Free", Manufacturer Part Number=NCP114ASN330T1G, Mount="Surface Mount", Number of Regulators=1, Output Configuration=Positive, Output Type=Fixed, Packaging="Cut Tape", Pricing 1="1=0.33000, 10=0.24900, 25=0.21760, 100=0.12440, 250=0.11664, 500=0.09330, 1000=0.07153 (USD)", RoHS=No, Stock 1=32529, Supplier 1=Digi-Key, Supplier 2=RSComponents, Supplier 3=Mouser, Supplier Part Number 2=1263178, Supplier Part Number 3=863-NCP114ASN330T1G
U2: "MCU 32-bit ARM Cortex M0+ RISC 32KB Flash 2.5V/3.3V 8-Pin SO N Tube", Manufacturer=STMicroelectronics, Supplier Part Number 1=497-19552-ND, Category=Microcontrollers, Checked By=?, ComponentLink1Description="Online datasheet", ComponentLink1URL=https://www.st.com/resource/en/datasheet/stm32g031c6.pdf, Created By="D. Gakure", Manufacturer Part Number=STM32G031J6M6, Pricing 1="1=1.80000, 10=1.61600, 25=1.52480, 100=1.29920, 250=1.21992, 500=1.06744, 1000=0.88952 (USD)", Pricing 2="1=1.91000, 25=1.70000, 75=1.63000, 150=1.59000, 400=1.53000 (USD)", Pricing 3="1=1.50000, 10=1.28000, 50=1.28000, 100=1.09000, 1000=0.73700, 10000=0.71100 (USD)", RoHS=Yes, Supplier 1=Digi-Key, Supplier 2="Future Electronics", Supplier 3=Mouser, Supplier Part Number 2=2116576, Supplier Part Number 3=511-STM32G031J6M6

## Via types
v1: diameter 0.6, hole 0.3, Top Layer to Bottom Layer, tented both sides, 28 vias

## Nets (pads, with @x,y where several pads share a name; then routed paths per layer and width w, separated by ;. In a path a pad name is that pad's centre, name@x,y a point inside that pad or via, vN(x,y) a via of type N, cw(c..) or ccw(c..) an arc to the next point about the centre after c; other vN are vias at no path point)
3V3: C3.2 C5.2 D1.2 D4.1 J2.1 Q1.1 R2.1 U1.5 U2.2 | length 52.7
  Top Layer w0.5: v1@-0.3,28.25 0.456,29.006 v1(0.456,30.888)
  Bottom Layer w0.3: U1.5@-1.325,53.175 -2.105,52.395 -2.105,49.674 0.455,47.114 0.455,45.06 -1.165,43.44 -1.165,41.735 -1.173,41.727 -1.173,39.127 -0.009,37.963 -0.009,32.944 U2.2@0.56,32.375 ; D4.1 0.675,8.672 -0.038,9.385 -0.038,14.933 0.1,15.071 0.1,22.125 Q1.1@0.8,22.825
  Bottom Layer w0.5: U1.5@-1.325,53.175 U1.5 ; U1.5@-1.225,53.2 C3.2 D1.2 ; v1(-0.346,28.269) -0.346,24.618 -0.053,24.325 -0.05,24.325 -0.05,23.675 Q1.1@0.8,22.825 ; C5.2 0.375,30.4 0.435,30.46 v1@0.435,30.888 ; v1(0.456,30.888) 0.456,30.915 0.56,31.019 U2.2@0.56,31.875 ; U2.2 U2.2@0.61,32.325
GND: C1.1 C2.1 C3.1 C4.1 C5.1 C6.1 C7.1 C8.1 C9.1 C10.1 C11.1 C12.1 C13.1 C14.1 D1.1 D2.2 D3.2 D6.2 D7.2 D8.3 D9.3 D10.3 D11.3 D12.3 D13.3 D14.3 D15.3 D16.3 D17.3 J1.2 J2.3 J3.2 MH1.1 MH2.1 U1.2 U2.3 | length 152.9
  Top Layer w0.5: MH2.1 -5.826,74.901 -3.547,74.901 -2.256,73.609 -2.256,71.493 -1.963,71.2 -1.85,71.2 D17.3@-1.65,71 ; -2.456,9.719 -0.941,11.234 0.862,11.234 0.935,11.161 v1(0.962,11.161) ; D8.3 -1.65,7.775 -1.85,7.975 -2.032,7.975 -2.475,8.418 v1(-2.475,9.222) -2.475,13.4 -1.65,14.225 D9.3@-1.65,14.825 ; D12.3 -1.65,35.275 -2.475,34.45 -2.475,29.675 D11.3@-1.65,28.85 ; D12.3@-1.65,36.075 -1.65,38.468 ; D13.3@-1.65,42.3 -2.475,41.475 -2.475,39.293 -1.65,38.468 ; D13.3 -1.65,44.925 ; v1(-0.625,29.656) -0.644,29.637 -0.713,29.637 -1.3,29.05 -1.45,29.05 D11.3@-1.65,28.85 ; J2.3 -0.448,45.427 -1.148,45.427 -1.65,44.925 ; v1(0.475,73.125) D17.3@-1.65,71 ; v1(0.685,18.165) 0.666,18.146 0.666,17.141 D9.3@-1.65,14.825 ; v1(0.691,39.933) -0.185,39.933 -1.65,38.468 ; D9.3@-1.65,14.825 -1.85,15.025 -1.856,15.025 -2.475,15.644 -2.475,20.4 -1.65,21.225 D10.3 -1.65,21.825 -2.478,22.653 -2.478,27.422 -1.65,28.25 D11.3 D11.3@-1.65,28.85 ; -1.65,44.925 -2.475,45.75 -2.475,48.5 -1.65,49.325 -1.65,49.925 -2.175,50.45 -2.182,50.45 -2.475,50.743 -2.475,55.525 -1.65,56.35 -1.65,56.95 -1.85,57.15 -1.9,57.15 -2.475,57.725 -2.475,62.55 -1.65,63.375 D16.3 -1.85,63.875 -1.85,64.18 -2.478,64.807 -2.478,69.572 -1.65,70.4 D17.3@-1.65,71
  Bottom Layer w0.5: v1(-2.475,9.222) -2.475,8.61 -1.065,7.2 -1.065,6.795 D2.2 -1.04,6.385 J1.2@0,5.345 ; D7.2 -1.04,76.765 J3.2@0,77.805 ; v1(-0.625,29.656) -0.081,29.656 C11.1@0.575,29 ; C5.1 U2.3@-0.625,31.315 ; v1@-0.608,29.673 C5.1@-0.608,30.358 ; J1.2@0,5.3 J1.2@0,5.345 ; J3.2@0,77.85 J3.2@0,77.805 ; C14.1 0.54,73.217 0.475,73.152 v1(0.475,73.125) ; C14.1@0.54,75.35 0.54,75.399 1.04,75.899 D6.2 1.04,76.765 J3.2@0,77.805 ; C11.1@0.562,28.937 0.562,26.435 0.575,26.421 C8.1@0.575,26.263 ; C12.1@0.6,48.8 0.6,49.65 0.307,49.943 0.282,49.943 0.225,50 C2.1 0.225,50.05 -0.217,50.492 -0.217,51.91 0.075,52.203 0.339,52.203 ; 0.6,61.225 C1.1 -0.325,61.25 -0.525,61.45 -0.525,64.775 1.425,66.725 C13.1 1.425,66.775 0.475,67.725 v1(0.475,73.125) ; C7.1 0.625,18.253 0.685,18.192 v1(0.685,18.165) ; C10.1 0.65,40.002 0.691,39.96 v1(0.691,39.933) ; D1.1@0.675,56.65 D1.1@0.679,56.654 ; C4.1 0.679,61.029 0.679,56.504 D1.1 0.675,56.35 0.875,56.15 C9.1 0.875,54.875 C3.1 -0.225,52.767 0.339,52.203 ; v1(0.962,11.161) 0.962,11.188 1.012,11.238 1.012,11.455 1.254,11.696 1.284,11.696 1.637,12.05 C6.1 ; D3.2 1.04,6.385 J1.2@0,5.345 ; U1.2 1.203,52.203 0.339,52.203 ; MH1.1 6.029,75.104 4.293,75.104 2.314,73.125 v1(0.475,73.125)
  other v1: 0,2.425 0,80.725
JD_DATA: D3.1 D7.1 FB1.1 J1.1 J3.1 MH3.1 | length 89.1
  Top Layer w0.29: J1.1@-1.27,2.675 -1.27,3.7 -0.49,4.48 0.45,4.48 J1.1@1.27,5.3 ; J3.1@-1.27,77.85 -0.45,78.67 0.49,78.67 1.27,79.45 J3.1@1.27,80.475
  Top Layer w0.3: v1@-1.803,67.253 -1.78,67.253 0.167,65.307 v1(0.167,63.46)
  Bottom Layer w0.3: v1(-1.803,67.276) -1.803,67.357 -2.27,67.825 -2.27,75.675 -1.69,76.255 D7.1 -1.69,77.211 -1.27,77.631 J3.1@-1.27,77.85 ; v1(0.167,63.46) 0.158,63.452 0.158,62.688 FB1.1 0.15,62.58 0.3,62.43 0.676,62.054 2.137,62.054 2.578,61.614 2.578,9.337 4.09,7.825 ; J1.1@1.27,5.3 1.27,5.461 1.69,5.881 1.69,6.903 1.866,7.078 3.003,7.078 3.75,7.825 4.09,7.825 ; MH3.1 4.09,7.825
JD_DATA_MCU/SWCLK: D1.3 J2.4 R1.1 U2.8 | length 25.8
  Top Layer w0.3: v1@-0.547,49.325 -0.532,49.34 -0.532,55.03 -0.016,55.545 v1(-0.016,55.575)
  Bottom Layer w0.3: v1(-0.566,49.344) -0.509,49.287 -0.509,48.859 1.301,47.049 J2.4 2.131,44.67 2.131,43.256 0.116,41.241 0.116,39.389 1.88,37.625 U2.8 ; R1.1 -0.275,55.901 -0.016,55.642 v1(-0.016,55.575)
JD_PWR: C2.2 C4.2 C6.2 C7.2 C8.2 C9.2 C10.2 C11.2 C12.2 C13.2 C14.2 D2.1 D6.1 D8.1 D9.1 D10.1 D11.1 D12.1 D13.1 D14.1 D15.1 D16.1 D17.1 J1.3 J3.3 MH4.1 R3.1 U1.1 U1.3 | length 118.3
  Top Layer w0.5: J1.3@-1.27,5.3 -1.27,6.032 -0.977,6.325 2.025,6.325 2.408,5.942 ; J3.3@-1.27,80.725 -1.27,79.45 -2.338,78.382 -2.338,77.189 -2.025,76.875 0.333,76.875 1.27,77.812 1.27,77.688 1.65,77.308 D17.1 1.65,75.3 2.316,74.634 v1@2.316,74.546 ; v1@1.256,29.807 1.256,32.536 1.45,32.73 1.45,33.25 D11.1 ; J1.3@1.27,2.425 1.27,3.645 2.107,4.482 2.116,4.482 2.408,4.775 2.408,5.942 ; v1(1.578,25.251) 1.597,25.27 1.597,26.372 D10.1 ; v1@1.597,25.232 1.61,25.218 1.597,25.205 1.656,25.145 1.656,25.069 2.475,24.25 2.475,20.55 1.65,19.725 D9.1 1.594,19.369 1.594,18.394 v1(1.575,18.375) 1.575,16.374 2.475,15.474 2.475,13.5 1.65,12.675 D8.1 1.662,12.363 1.662,10.383 1.731,10.315 1.731,10.271 v1@1.777,10.225 ; D11.1@1.656,33.756 2.475,34.575 2.475,38.794 2.022,39.247 2.035,39.261 2.035,39.288 1.85,39.473 1.85,40.575 1.65,40.775 2.475,41.6 2.475,46.4 1.875,47 1.85,47 1.65,47.2 D13.1 1.85,47.7 1.85,48.279 1.913,48.342 v1(1.913,48.369) ; v1(1.75,10.225) v1@1.777,10.225 ; v1(1.913,53.775) 1.913,53.802 1.85,53.865 1.85,54.025 1.65,54.225 1.65,54.825 2.475,55.65 2.475,59.748 v1@1.925,60.298 ; v1(1.913,60.325) 1.913,60.352 1.85,60.415 1.85,61.65 1.65,61.85 2.475,62.675 2.475,67.425 2.378,67.523 v1(2.378,67.55) ; v1@1.983,53.767 2.475,53.275 2.475,48.625 v1@2.111,48.261 ; v1(2.336,74.572) 2.336,73.411 2.475,73.272 2.475,69.7 1.65,68.875 1.65,68.275 v1@2.378,67.547 ; v1@1.777,10.225 3.375,8.627 3.375,6.908 2.408,5.942
  Bottom Layer w0.5: MH4.1 -2.745,7.825 D2.1 -1.69,5.875 -1.27,5.455 J1.3@-1.27,5.3 ; v1@1.175,29.788 1.175,29.4 1.575,29 1.575,25.253 v1(1.578,25.251) ; U1.3 C2.2 1.225,50 1.282,49.943 1.307,49.943 1.6,49.65 1.6,48.75 1.894,48.456 1.894,48.388 v1(1.913,48.369) ; U1.1 1.375,53.175 1.894,53.694 1.894,53.756 v1(1.913,53.775) ; J3.3@1.27,77.85 1.282,77.85 1.282,77.673 1.69,77.265 D6.1 1.69,75.5 1.54,75.35 1.54,75.3 2.249,74.591 2.316,74.591 v1(2.336,74.572) ; v1(1.575,18.375) 1.575,18.402 1.625,18.452 C7.2 ; C10.2 1.65,39.7 1.913,39.437 v1(1.913,39.41) ; C6.2 1.687,11.05 1.687,10.315 1.75,10.252 1.75,10.198 1.975,9.973 R3.1 ; C9.2 1.875,53.905 1.894,53.886 1.894,53.818 v1@1.956,53.756 ; C4.2 1.875,60.39 1.913,60.352 v1(1.913,60.325) ; v1(2.378,67.55) 2.378,67.523 2.425,67.475 C13.2
  other v1: 1.156,29.807
JD_RGB_B: R4.2 U2.5 | length 20.6
  Bottom Layer w0.3: R4.2 -1.955,17.15 -2.055,17.25 -2.055,17.275 -2.578,17.797 -2.578,34.176 -1.93,34.824 U2.5
JD_RGB_G: R5.2 U2.6 | length 21.2
  Bottom Layer w0.3: R5.2 -0.9,17.15 -1,17.25 -1,17.275 -2.05,18.325 -2.05,22.88 -1.228,23.702 -1.228,28.217 -1.235,28.224 -1.235,32.739 -0.66,33.314 U2.6
JD_RGB_R: R6.2 U2.1 | length 15.9
  Bottom Layer w0.3: R6.2 1.351,17.15 2.153,17.952 2.153,29.311 2.063,29.401 2.063,30.4 1.88,30.583 U2.1 ; U2.1@1.705,31.925 U2.1@1.792,31.838
NetC1_2: C1.2 FB1.2 R1.2 | length 2.7
  Bottom Layer w0.3: R1.2@-1.325,60.025 C1.2 -1.325,62.605 FB1.2
NetD4_2: D4.2 R6.1 | length 6.7
  Bottom Layer w0.3: D4.2 0.75,10.56 0.387,10.923 0.387,14.398 0.75,14.761 R6.1
NetD4_3: D4.3 R5.1 | length 6.8
  Bottom Layer w0.3: R5.1@-0.875,16.1 -0.95,16.1 -1.3,15.75 -1.3,10.247 -0.825,9.772 D4.3
NetD4_4: D4.4 R4.1 | length 8
  Bottom Layer w0.3: R4.1 -1.93,9.772 -1.802,9.644 -1.797,9.644 -0.825,8.672 D4.4
NetD8_2: D8.2 D9.4 | length 4.5
  Top Layer w0.3: D8.2 -1.65,12.675 -0.835,13.49 0.915,13.49 1.65,14.225 D9.4
NetD9_2: D9.2 D10.4 | length 4.5
  Top Layer w0.3: D9.2 -1.65,19.725 -1.025,20.35 0.775,20.35 1.65,21.225 D10.4
NetD10_2: D10.2 D11.4 | length 4.5
  Top Layer w0.3: D10.2 -1.65,26.725 -1.026,27.349 0.749,27.349 1.35,27.95 1.65,28.25 D11.4
NetD11_2: D11.2 D12.4 | length 4.5
  Top Layer w0.3: D11.2 -1.65,33.75 -0.944,34.456 0.831,34.456 1.65,35.275 D12.4
NetD12_2: D12.2 D13.4 | length 4.4
  Top Layer w0.3: D12.2 -0.175,40.475 1.65,42.3 D13.4
NetD13_2: D13.2 D14.4 | length 4.5
  Top Layer w0.3: D13.2 -1.65,47.8 -0.95,48.5 0.825,48.5 1.65,49.325 D14.4
NetD14_2: D14.2 D15.4 | length 4.4
  Top Layer w0.3: D14.2 -1.65,54.825 -1.35,55.125 -1.279,55.125 0.195,56.6 1.6,56.6 D15.4
NetD15_2: D15.2 D16.4 | length 4.5
  Top Layer w0.3: D15.2 -1.65,61.85 -0.82,62.68 0.955,62.68 1.65,63.375 D16.4
NetD16_2: D16.2 D17.4 | length 4.6
  Top Layer w0.3: D16.2 -1.65,68.875 -0.975,69.55 0.9,69.55 1.35,70 1.35,70.4 D17.4
nRESET/M_RGB_LED: J2.5 Q1.2 R2.2 U2.4 | length 30.5
  Top Layer w0.3: v1(-1.803,25.244) -1.721,25.244 -1.323,24.845 v1(0.626,24.845)
  Bottom Layer w0.3: v1(-1.803,25.244) -1.86,25.301 -1.86,31.855 U2.4 -1.93,33.245 -1.35,33.825 -1.35,38.209 -2.184,39.043 -2.184,44.961 J2.5 ; Q1.2@0.55,21.175 0.8,20.925 Q1.2 0.9,20.925 1.15,21.175 1.15,21.225 1.625,21.7 1.625,23.625 0.85,24.4 0.85,24.478 v1@0.615,24.712
RGB_LED: D8.4 Q1.3 R3.2 | length 17.4
  Top Layer w0.3: v1(-0.675,10.545) -0.618,10.488 -0.618,10.043 D8.4@1.65,7.775 ; D8.4 D8.4@1.65,7.775 ; v1@2.346,8.416 2.006,8.075 1.95,8.075 D8.4@1.65,7.775
  Bottom Layer w0.25: Q1.3@-1.1,21.875 -0.306,21.081 -0.306,15.462 -0.675,15.093 v1(-0.675,10.545)
  Bottom Layer w0.3: R3.2 2.075,8.325 2.272,8.325 2.419,8.472 v1(2.5,8.472)
SWDIO: J2.2 U2.7 | length 8.3
  Bottom Layer w0.3: U2.7 0.65,37.265 0.65,38.004 -0.525,39.179 -0.525,42.263 1.301,44.089 J2.2
pads on no net: D17.2 J1. J3. U1.4

## Silkscreen, mask and mechanical layers (free items; w line width, h text height)
Top Overlay:
  region: 187 vertices and 1 holes, not listed, extent 3.506,73.644 4.832,76.999
  text "9" at 0.75,69.25 h1.5 r90
  text "0" at 0.75,6.225 h1.5 r90
Bottom Overlay:
  drawing of 6 lines, arcs and shapes, not listed
  text "'.ProjectCodenameID'-'.ProjectRevision'" at -2.425,65.775 h0.9 r270
  text "JacdacRgbLedBar10" at -1.35,63.325 h0.9 r270
Dimension:
  lines w0.05: -3.27,77.965 -3.27,82.35 cw(c-2.47,82.35) -2.47,83.15 2.47,83.15 cw(c2.47,82.35) 3.27,82.35 3.27,77.966 ; -3.27,77.968 cw(c-4.27,77.968) -4.27,76.968 -4.831,76.968 cw(c-4.831,77.968) -5.304,77.087 ccw(c-6.25,75.325) -5.4,73.515 cw(c-4.677,71.976) -2.977,71.976 -2.978,11.175 cw(c-4.677,11.175) -5.4,9.636 ccw(c-6.25,7.826) -5.304,6.064 cw(c-4.831,5.183) -4.831,6.183 -4.27,6.183 cw(c-4.27,5.183) -3.27,5.183 -3.27,0.8 ccw(c-2.47,0.8) -2.47,0 2.47,0 ccw(c2.47,0.8) 3.27,0.8 3.27,5.183 cw(c4.27,5.183) 4.27,6.183 4.831,6.183 cw(c4.831,5.183) 5.304,6.064 ccw(c6.25,7.826) 5.4,9.636 cw(c4.677,11.175) 2.977,11.175 2.977,71.976 cw(c4.677,71.976) 5.4,73.515 ccw(c6.25,75.325) 5.304,77.087 cw(c4.831,77.968) 4.831,76.968 4.27,76.968 cw(c4.27,77.968) 3.27,77.968
Board Outline:
  lines w0.2: -3.27,77.965 -3.27,82.35 cw(c-2.47,82.35) -2.47,83.15 2.47,83.15 cw(c2.47,82.35) 3.27,82.35 3.27,77.966 ; -3.27,77.968 cw(c-4.27,77.968) -4.27,76.968 -4.831,76.968 cw(c-4.831,77.968) -5.304,77.087 ccw(c-6.25,75.325) -5.4,73.515 cw(c-4.677,71.976) -2.977,71.976 -2.978,11.175 cw(c-4.677,11.175) -5.4,9.636 ccw(c-6.25,7.826) -5.304,6.064 cw(c-4.831,5.183) -4.831,6.183 -4.27,6.183 cw(c-4.27,5.183) -3.27,5.183 -3.27,0.8 ccw(c-2.47,0.8) -2.47,0 2.47,0 ccw(c2.47,0.8) 3.27,0.8 3.27,5.183 cw(c4.27,5.183) 4.27,6.183 4.831,6.183 cw(c4.831,5.183) 5.304,6.064 ccw(c6.25,7.826) 5.4,9.636 cw(c4.677,11.175) 2.977,11.175 2.977,71.976 cw(c4.677,71.976) 5.4,73.515 ccw(c6.25,75.325) 5.304,77.087 cw(c4.831,77.968) 4.831,76.968 4.27,76.968 cw(c4.27,77.968) 3.27,77.968
Top Assy:
  lines w0.05: -3.27,77.965 -3.27,82.35 cw(c-2.47,82.35) -2.47,83.15 2.47,83.15 cw(c2.47,82.35) 3.27,82.35 3.27,77.966 ; -3.27,77.968 cw(c-4.27,77.968) -4.27,76.968 -4.831,76.968 cw(c-4.831,77.968) -5.304,77.087 ccw(c-6.25,75.325) -5.4,73.515 cw(c-4.677,71.976) -2.977,71.976 -2.978,11.175 cw(c-4.677,11.175) -5.4,9.636 ccw(c-6.25,7.826) -5.304,6.064 cw(c-4.831,5.183) -4.831,6.183 -4.27,6.183 cw(c-4.27,5.183) -3.27,5.183 -3.27,0.8 ccw(c-2.47,0.8) -2.47,0 2.47,0 ccw(c2.47,0.8) 3.27,0.8 3.27,5.183 cw(c4.27,5.183) 4.27,6.183 4.831,6.183 cw(c4.831,5.183) 5.304,6.064 ccw(c6.25,7.826) 5.4,9.636 cw(c4.677,11.175) 2.977,11.175 2.977,71.976 cw(c4.677,71.976) 5.4,73.515 ccw(c6.25,75.325) 5.304,77.087 cw(c4.831,77.968) 4.831,76.968 4.27,76.968 cw(c4.27,77.968) 3.27,77.968
Bottom Assy:
  lines w0.05: -3.27,77.965 -3.27,82.35 cw(c-2.47,82.35) -2.47,83.15 2.47,83.15 cw(c2.47,82.35) 3.27,82.35 3.27,77.966 ; -3.27,77.968 cw(c-4.27,77.968) -4.27,76.968 -4.831,76.968 cw(c-4.831,77.968) -5.304,77.087 ccw(c-6.25,75.325) -5.4,73.515 cw(c-4.677,71.976) -2.977,71.976 -2.978,11.175 cw(c-4.677,11.175) -5.4,9.636 ccw(c-6.25,7.826) -5.304,6.064 cw(c-4.831,5.183) -4.831,6.183 -4.27,6.183 cw(c-4.27,5.183) -3.27,5.183 -3.27,0.8 ccw(c-2.47,0.8) -2.47,0 2.47,0 ccw(c2.47,0.8) 3.27,0.8 3.27,5.183 cw(c4.27,5.183) 4.27,6.183 4.831,6.183 cw(c4.831,5.183) 5.304,6.064 ccw(c6.25,7.826) 5.4,9.636 cw(c4.677,11.175) 2.977,11.175 2.977,71.976 cw(c4.677,71.976) 5.4,73.515 ccw(c6.25,75.325) 5.304,77.087 cw(c4.831,77.968) 4.831,76.968 4.27,76.968 cw(c4.27,77.968) 3.27,77.968

## Dimensions
-6.25,7.825 to -6.25,75.325 on Dimension
-6.25,7.825 to 6.25,7.825 on Dimension
-2.47,0 to 2.47,83.15 on Dimension
-3.27,0.8 to 3.27,0.8 on Dimension
-2.978,11.175 to 2.977,11.175 on Dimension

## Text inside footprints (layer, text, board x,y; h text height)
J1: Alignment "board outline  / for 'innie'" at 4.53,7.831 h1.2 r180; Alignment "board outline  / for 'outie'" at 5.14,4.986 h1.2 r180; Mechanical 9 "Jacdac / cable connector  / body" at -4.821,-4.158 h1.7 r180
J3: Alignment "board outline  / for 'innie'" at -4.53,75.319 h1.2; Alignment "board outline  / for 'outie'" at -5.14,78.164 h1.2; Mechanical 9 "Jacdac / cable connector  / body" at 4.821,87.308 h1.7
MH4: Alignment "board outline can  / be on 2.0mm   / radius if necessary" at -18.95,8.975 h0.5; Alignment "5mm dia keepout  / for traces and  / components to  / allow space for  / bushes/standoffs/ / nuts/screw heads" at -18.725,2.25 h0.5